# Altium PCB PCB1_Fontes_Chaveadas.PcbDoc
Units mil, origin at the board's own origin, x right, y up, seen from the top; angles counter-clockwise.
Board outline 6000 x 4000 mil, 2 copper layers (Top Layer, Bottom Layer); 84 components, 45 nets, 203 pads, 0 vias.
Unrouted connection lines stored in the file: 104.
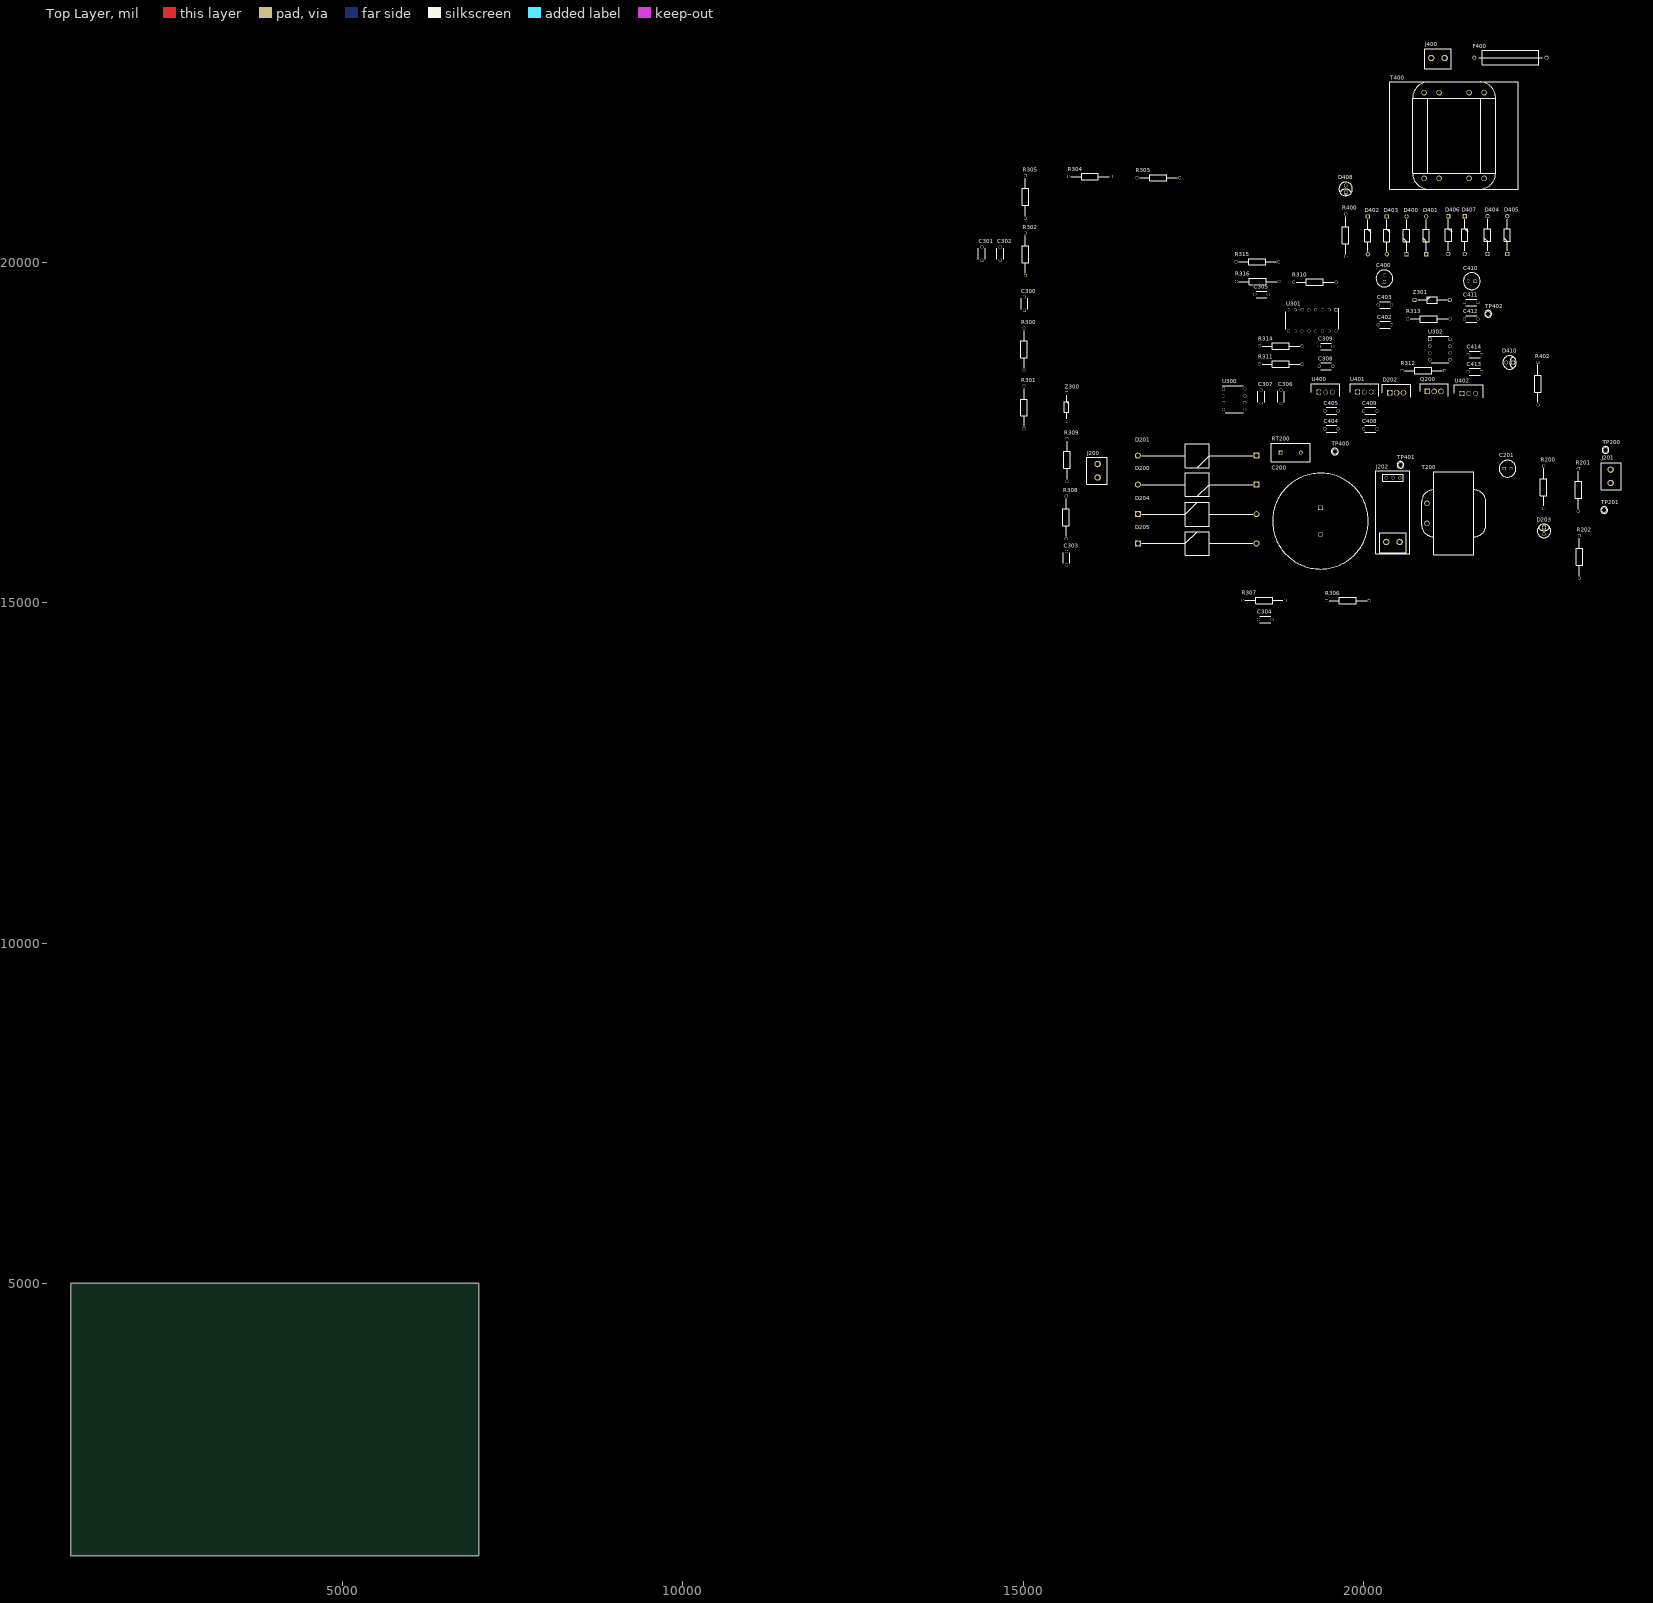
[diagram p0: Top Layer view]
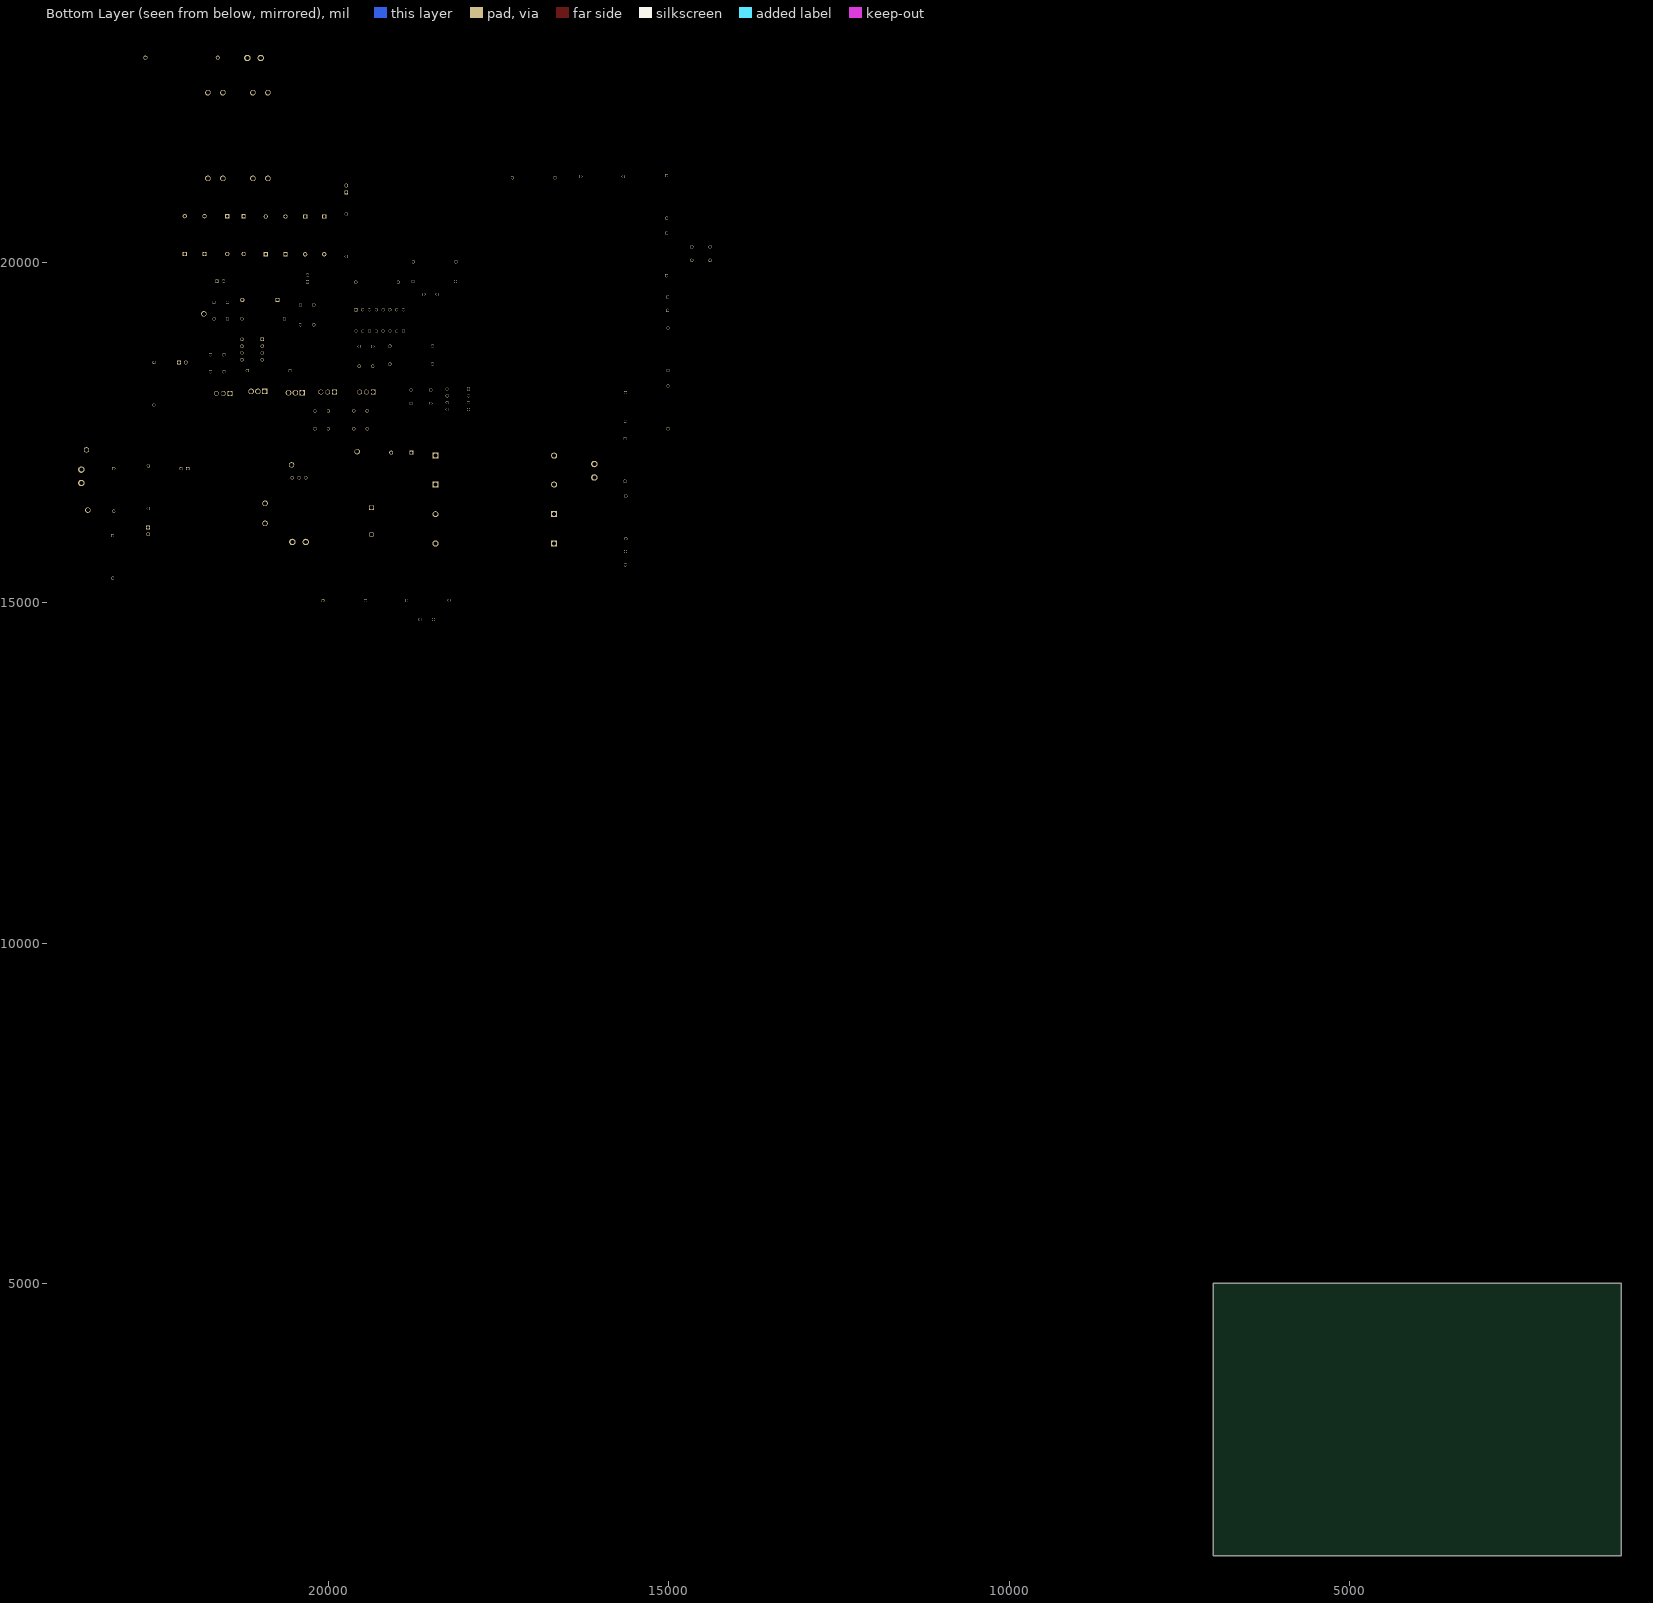
[diagram p1: Bottom Layer view, seen from below]

## Layer stack, top to bottom
Top Solder: solder mask 0.4, Solder Resist, Dk 3.5
Top Layer: signal copper 1.4
Dielectric 1: dielectric 12.6, FR-4, Dk 4.8
Bottom Layer: signal copper 1.4
Bottom Solder: solder mask 0.4, Solder Resist, Dk 3.5

## Board outline
1000,1000 7000,1000 7000,5000 1000,5000

## Design rules (kind name [scope] priority, off if disabled: settings)
Clearance [All] p1: gap=10
Height [All] p1: minheight=0 maxheight=2000 prefheight=500
PolygonConnect [All] p1: connectstyle=Relief reliefconductorwidth=10 reliefentries=4 polygonreliefangle="90 Angle" airgapwidth=10
RoutingVias [All] p1: holewidth=28 width=50 viastyle="Through Hole" minholewidth=28 minwidth=50 maxholewidth=28 maxwidth=50
SolderMaskExpansion [All] p1: expansion=4
Width [All] p1: maxlimit=10 minlimit=10 preferedwidth=10
29 further rules are at their usual default settings.

## Classes and differential pairs
component class U_Sheet3_Fontes_Chaveadas_Fontes_Aux: C400 C402 C403 C404 C405 C408 C409 C410 C411 C412 C413 C414 D400 D401 D402 D403 D404 D405 D406 D407 D408 D410 F400 J400 R400 R402 T400 TP400 TP401 TP402 U400 U401 U402
component class U_Sheet2_Fontes_Chaveadas_Controle: C300 C301 C302 C303 C304 C305 C306 C307 C308 C309 R300 R301 R302 R303 R304 R305 R306 R307 R308 R309 R310 R311 R312 R313 R314 R315 R316 U300 U301 U302 Z300 Z301
component class U_Sheet1_Fontes_Chaveadas_Potencia: C200 C201 D200 D201 D202 D203 D204 D205 J200 J201 J202 Q200 R200 R201 R202 RT200 T200 TP200 TP201

## Components (designator, comment, footprint, x,y, rotation, side; value= is the part's Value field where it differs from the comment)
C200 "5600UF 100V" CAP_RAD_D35MM_L10MM 19370,16400 r270 top
C201 "22UF 35V" CAP_RAD_D6MM3_L2MM5 22070,16975 r0 top
C300 "9PF 100V" CAP_RAD_4X2MM5 15017.76,19301.02 r90 top
C301 "1500PF 50V" CAP_RAD_4X2MM5 14392.76,20036.02 r90 top
C302 "1500PF 50V" CAP_RAD_4X2MM5 14662.76,20036.02 r90 top
C303 "1200PF 50V" CAP_RAD_4X2MM5 15637.76,15561.02 r90 top
C304 "12NF 50V" CAP_RAD_4X2MM5 18458.98,14757.76 r0 top
C305 "9PF 100V" CAP_RAD_4X2MM5 18405,19535 r0 top
C306 "100NF 100V" CAP_RAD_4X2MM5 18790,18130 r270 top
C307 "10NF 100V" CAP_RAD_4X2MM5 18500,18130 r270 top
C308 "100NF 100V" CAP_RAD_4X2MM5 19550,18480 r180 top
C309 "10NF 100V" CAP_RAD_4X2MM5 19550,18770 r180 top
C400 "22UF 35V" CAP_RAD_D6MM3_L2MM5 20310,19720 r90 top
C402 "100NF 100V" CAP_RAD_4X2MM5 20415,19090 r180 top
C403 "10NF 100V" CAP_RAD_4X2MM5 20415,19380 r180 top
C404 "100NF 100V" CAP_RAD_4X2MM5 19631.16,17560 r180 top
C405 "10NF 100V" CAP_RAD_4X2MM5 19631.16,17824.09 r180 top
C408 "100NF 100V" CAP_RAD_4X2MM5 20201.16,17560 r180 top
C409 "10NF 100V" CAP_RAD_4X2MM5 20201.16,17824.09 r180 top
C410 "22UF 35V" CAP_RAD_D6MM3_L2MM5 21642.98,19730 r180 top
C411 "100NF 100V" CAP_RAD_4X2MM5 21684.38,19417.83 r180 top
C412 "10NF 100V" CAP_RAD_4X2MM5 21684.38,19175 r180 top
C413 "100NF 100V" CAP_RAD_4X2MM5 21736.16,18400 r180 top
C414 "10NF 100V" CAP_RAD_4X2MM5 21736.16,18650 r180 top
D200 "100V 6A" DIO_P600_AXIAL 18430,16740 r180 top
D201 "100V 6A" DIO_P600_AXIAL 18430,17165 r180 top
D202 "200V 5A" DIO_PTH_TO220AB 20390,18090 r0 top
D203 "RED" DIO_PTH_LED_RED 22655,16110 r270 top
D204 "100V 6A" DIO_P600_AXIAL 16685.91,16305 r0 top
D205 "100V 6A" DIO_P600_AXIAL 16685.91,15875 r0 top
D400 "1000V 1A" DIO_PTH_DO41_1N4007 20635,20125 r90 top
D401 "1000V 1A" DIO_PTH_DO41_1N4007 20925,20125 r90 top
D402 "1000V 1A" DIO_PTH_DO41_1N4007 20065,20680.12 r270 top
D403 "1000V 1A" DIO_PTH_DO41_1N4007 20345,20680.12 r270 top
D404 "1000V 1A" DIO_PTH_DO41_1N4007 21825,20130 r90 top
D405 "1000V 1A" DIO_PTH_DO41_1N4007 22115,20130 r90 top
D406 "1000V 1A" DIO_PTH_DO41_1N4007 21250,20685.12 r270 top
D407 "1000V 1A" DIO_PTH_DO41_1N4007 21490,20685.12 r270 top
D408 "RED" DIO_PTH_LED_RED 19740,21035 r90 top
D410 "RED" DIO_PTH_LED_RED 22200,18535 r180 top
F400 "5A 250VAC" FUSE_PTH_5X20MM 21630,23015 r0 top
J200 "KRE 2POS" CONN_KF3012P 16095,16845 r90 top
J201 "KRE 2POS" CONN_KF3012P 23635,16960 r270 top
J202 "ACS712 5A" MODULE_ACS712 20535,16840 r180 top
J400 "KRE 2POS" CONN_KF3012P 21195,23010 r180 top
Q200 "100V 50A" MOSFET_TO220AB 20940,18110 r0 top
R200 "2K2 1%" RES_PTH_AXIAL_250MW 22650,17015 r270 top
R201 "47K 1%" RES_PTH_AXIAL_250MW 23160,16975 r270 top
R202 "6K8 1%" RES_PTH_AXIAL_250MW 23175,15990 r270 top
R300 "470K 1%" RES_PTH_AXIAL_250MW 15012.76,18416.02 r90 top
R301 "9M1 5%" RES_PTH_AXIAL_250MW 15012.76,17561.02 r90 top
R302 "12K 1%" RES_PTH_AXIAL_250MW 15032.76,19811.02 r90 top
R303 "50R 1%" RES_PTH_AXIAL_250MW 17300,21250 r180 top
R304 "300R 1%" RES_PTH_AXIAL_250MW 16296.02,21267.24 r180 top
R305 "39R 1%" RES_PTH_AXIAL_250MW 15032.76,21281.02 r270 top
R306 "1K2 5%" RES_PTH_AXIAL_250MW 20085,15035 r180 top
R307 "12K 1%" RES_PTH_AXIAL_250MW 18853.98,15037.76 r180 top
R308 "3K9 1%" RES_PTH_AXIAL_250MW 15632.76,15946.02 r90 top
R309 "100K 1%" RES_PTH_AXIAL_250MW 15645,16790 r90 top
R310 "1K5 5%" RES_PTH_AXIAL_250MW 18975,19715 r0 top
R311 "1K 5%" RES_PTH_AXIAL_250MW 19100,18510 r180 top
R312 "10R 1%" RES_PTH_AXIAL_250MW 21195,18415 r180 top
R313 "1K2 5%" RES_PTH_AXIAL_250MW 20650,19175 r0 top
R314 "1K 5%" RES_PTH_AXIAL_250MW 19100,18775 r180 top
R315 "6K8 1%" RES_PTH_AXIAL_250MW 18755,20015 r180 top
R316 "10R 1%" RES_PTH_AXIAL_250MW 18135,19725 r0 top
R400 "1K2 5%" RES_PTH_AXIAL_250MW 19740,20091.75 r90 top
R402 "300R 1%" RES_PTH_AXIAL_250MW 22565,17910 r90 top
RT200 "10R 6A" NTC_P7MM8_13MM 18785,17210 r0 top
T200 "200MH" TRF_1COIL 20935,16465 r270 top
T400 "TRAFO_4COIL" TRF_8 21775,22500 r270 top
TP200 "TP" TP_TRUE_HOLE_P102 23560,17250 r90 top
TP201 "TP" TP_TRUE_HOLE_P102 23540,16365 r90 top
TP400 "TP" TP_TRUE_HOLE_P102 19580,17225 r90 top
TP401 "TP" TP_TRUE_HOLE_P102 20545,17030 r90 top
TP402 "TP" TP_TRUE_HOLE_P102 21835,19250 r0 top
U300 "LM311" IC_PTH_8DIP 17945,18145 r0 top
U301 "SG3524N" IC_16DIP 19600,19310 r270 top
U302 "OPTO 3.75KV" IC_OPTO_8DIP 20975,18875 r0 top
U400 "7815" IC_TO220AB 19345,18100 r0 top
U401 "7805" IC_TO220AB 19915,18100 r0 top
U402 "7815" IC_TO220AB 21450,18080 r0 top
Z300 "4.7V 500MW" DIO_DO35 15637.76,18091.02 r270 top
Z301 "15V 1.3W" DIO_1N4744A_DO204AL 20752.85,19455 r0 top

## Footprints (in the part's own frame and the unit in brackets; to place one, negate y for a bottom-side part, rotate by r counter-clockwise, add the part's x,y. Pads: shape width x height; smd on the part's side, far side on the other; paste and mask are expansions set on the pad)
CAP_RAD_4X2MM5 [mm] "Size / Dimension: 0.157\" L x 0.098\" W (4.00mm x 2.50mm)"
  round 1.2 hole 1: 1(0,0) 2(5,0)
  silkscreen extent 0.5,-1.25 4.5,1.25, body extent -0.25,-1.25 5.25,1.25, height 6.32
CAP_RAD_D6MM3_L2MM5 [mm] "Size / Dimension: 0.248\" Dia (6.30mm)"
  rect 1.2x1.2 hole 1: 1(0,0)
  round 1.2 hole 1: 2(2.5,0)
  silkscreen extent -1.9,-3.15 4.4,3.15, body extent -2.15,-3.4 4.65,3.4, height 9.5
CAP_RAD_D35MM_L10MM [mm] "Size / Dimension: 1.378\" Dia (35.00mm)"
  rect 1.8x1.8 hole 1.5: 1(0,0)
  round 1.8 hole 1.5: 2(10,0)
  silkscreen extent -12.87,-17.87 22.87,17.88, body extent -13.25,-18.24 23.25,18.24, height 47
CONN_KF3012P [mm]
  round 2.4 hole 1.5: 1(0,0) 2(5,0)
  silkscreen extent -2.5,-3.5 7.5,4, body extent -2.99,-3.35 7.51,4.15, height 10
DIO_1N4744A_DO204AL [mm] "DO-204AL (DO-41) AD1310W86L370D235"
  rect 1.575x1.575 hole 1: 1(0,0)
  round 1.575 hole 1: 2(13.1,0)
  silkscreen extent 1.14,-1.17 11.96,1.17, body extent -0.43,-1.3 13.53,1.3, height 2.6
DIO_DO35 [mm] "Package / Case: DO-204AH, DO-35, Axial"
  rect 1.15x1.15 hole 1: 1(0,0)
  round 1.15 hole 1: 2(10.7,0)
  silkscreen extent 0.92,-0.86 9.77,0.86, body extent -0.27,-0.95 10.95,0.95, height 1.91
DIO_P600_AXIAL [mm] "Package / Case: P600, Axial"
  rect 2.25x2.25 hole 1.5: 1(0,0)
  round 2.25 hole 1.5: 2(44.3,0)
  silkscreen extent 1.48,-4.43 42.82,4.43, body extent 0,0 0.25,0.25, height 0.25
DIO_PTH_DO41_1N4007 [mm] "DO-204AL, DO-41, axial"
  rect 1.575x1.575 hole 1: 1(0,0)
  round 1.575 hole 1: 2(14.1,0)
  silkscreen extent 1.14,-1.17 12.96,1.17, body extent -0.43,-1.35 14.48,1.35, height 2.7
DIO_PTH_LED_RED [mm] "Radial T-1 3/4"
  rect 1.416x1.416 hole 1: 1(0,0)
  round 1.416 hole 1: 2(2.54,0)
  silkscreen extent -1.25,-2.53 3.8,2.53, body extent -1.25,-2.95 4.2,2.95, height 13.41
DIO_PTH_TO220AB [mm] "TO-220-3"
  rect 2.085x2.085 hole 1.5: 1(0,0)
  round 2.085 hole 1.5: 2(2.54,0) 3(5.08,0)
  silkscreen extent -2.8,-1.61 7.88,3.22, body extent -2.54,-1.61 7.62,3.22, height 21.46
FUSE_PTH_5X20MM [mm] "Diâm. 0,217\" x comp. 0,827\" (5,50mm x 21,00mm)"
  round 1.5 hole 1: 1(0,0) 2(27,0)
  silkscreen extent 1.6,-2.7 25.4,2.7, body extent 3.5,-2.57 23.5,2.63, height 5.1
IC_16DIP [mm] "Package / Case: 16-DIP (0.300\", 7.62mm)"
  rect 1.13x1.13 hole 1: 1(0,0)
  round 1.13 hole 1: 2(0,-2.54) 3(0,-5.08) 4(0,-7.62) 5(0,-10.16) 6(0,-12.7) 7(0,-15.24) 8(0,-17.78) 9(7.94,-17.78) 10(7.94,-15.24) 11(7.94,-12.7) 12(7.94,-10.16) 13(7.94,-7.62) 14(7.94,-5.08) 15(7.94,-2.54) 16(7.94,0)
  silkscreen extent -0.57,-18.73 7.27,0.95, body extent 3.97,-8.89 4.22,-8.64, height 0.25
IC_OPTO_8DIP [mm] "8-DIP (0.300\", 7.62mm)"
  rect 1.25x1.25 hole 1: 1(0,0)
  round 1.25 hole 1: 2(0,-2.54) 3(0,-5.08) 4(0,-7.62) 5(7.62,-7.62) 6(7.62,-5.08) 7(7.62,-2.54) 8(7.62,0)
  silkscreen extent -0.63,-8.76 7.11,1.14, body extent -0.16,-8.63 7.78,1.01, height 4.7
IC_PTH_8DIP [mm] "8-DIP (0.300\", 7.62mm)"
  rect 1.13x1.13 hole 1: 1(0,0)
  round 1.13 hole 1: 2(0,-2.54) 3(0,-5.08) 4(0,-7.62) 5(7.94,-7.62) 6(7.94,-5.08) 7(7.94,-2.54) 8(7.94,0)
  silkscreen extent -0.57,-8.89 7.27,1.27, body extent -0.13,-8.45 8.07,0.83, height 4.21
IC_TO220AB [mm] "TO-220-3"
  rect 1.8x1.8 hole 1.5: 1(0,0)
  round 1.8 hole 1.5: 2(2.535,0) 3(5.07,0)
  silkscreen extent -2.8,-1.55 7.87,3.15, body extent -2.55,-1.55 7.61,3.15, height 18.54
MODULE_ACS712 [mm] "Módulo Sensor de Corrente ACS712 5A"
  round 1.2 hole 1: 1(0,0) 2(2.54,0) 3(5.08,0)
  round 2.4 hole 1.5: 4(0.04,23.948) 5(5.04,23.948)
  silkscreen extent -3.81,-2.54 8.89,28.45, body extent -2.72,20.16 7.78,27.66, height 14
MOSFET_TO220AB [mm] "Package / Case: TO-220-3"
  rect 2.07x2.07 hole 1.5: 1(0,0)
  round 2.07 hole 1.5: 2(2.54,0) 3(5.08,0)
  silkscreen extent -2.72,-1.73 7.8,2.92, body extent -2.6,-1.73 7.68,2.92, height 18.74
NTC_P7MM8_13MM [mm] "ICL 10 OHM 20% 6A 13MM"
  rect 1.5x1.5 hole 1: 1(0,0)
  round 1.5 hole 1: 2(7.5,0)
  silkscreen extent -3.5,-3.5 11,3.5, body extent -2.84,-3.5 10.46,3.5, height 19.85
RES_PTH_AXIAL_250MW [mm] "0.094\" Dia x 0.248\" L (2.40mm x 6.30mm)"
  round 1.2 hole 1: 1(0,0) 2(15.9,0)
  silkscreen extent 0.95,-1.2 14.95,1.2, body extent -0.3,-1.3 16.2,1.3, height 2.6
TP_TRUE_HOLE_P102 [mm]
  round 2 hole 1.5: 1(0,0)
  silkscreen extent -1.27,-1.27 1.27,1.27, body extent -1.27,-1.27 1.27,1.27, height 4.89
TRF_1COIL [mil] "BUSCK INDUCTOR"
  round 82 hole 59.06: 1(0,0) 2(295.28,0)
  silkscreen extent -463,-79 758,866, body extent -536,-191 839,969, height 1179
TRF_8 [mm] "Transformer; 8 Leads"
  round 2.083 hole 1.5: 1(0,0) 2(0,-5.6) 3(0,-16.8) 4(0,-22.4) 5(32,-22.4) 6(32,-16.8) 7(32,-5.6) 8(32,0)
  silkscreen extent -4,-35.2 36,12.8, body extent -7.12,-33.45 39.47,10.55, height 29.35

## Part data
C200: library part CAP_ALUM_5600UF_100V_RAD, "CAP ALUM 5600UF 20% 100V SNAP"
C201 C400 C410: library part CAP_ALUM_22UF_35V_RAD, "CAP ALUM POLY 22UF 20% 35V T/H"
C300 C305: library part CAP_CER_9PF_100V_RAD, "CAP CER 9PF 100V C0G RADIAL"
C301 C302: library part CAP_CER_1500PF_50V_RAD, "CAP CER 1500PF 50V C0G RADIAL"
C303: library part CAP_CER_1200PF_50V_RAD, "CAP CER 1200PF 50V C0G RADIAL"
C304: library part CAP_CER_12NF_50V_RAD, "CAP CER 0.012UF 50V C0G/NP0 RAD"
C306 C308 C402 C404 C408 C411 C413: library part CAP_CER_100NF_100V_RAD, "CAP CER 0.1UF 100V X7S RADIAL"
C307 C309 C403 C405 C409 C412 C414: library part CAP_CER_10NF_100V_RAD, "CAP CER 10NF 100V C0G/NP0 RADIAL"
D200 D201 D204 D205: library part DIO_PTH_STD_100V_6A_P600B, "DIODE GEN PURP 100V 6A P600"
D202: library part DIO_PTH_SCHOTTKY_MBR10200CT, "DIODE SCHOTTKY 200V 5A TO220AB"
D203 D408 D410: library part DIO_PTH_LED_RED_5MM, "LED RED DIFFUSED T-1 3/4 T/H"
D400 D401 D402 D403 D404 D405 D406 D407: library part DIO_PTH_STD_1000V_1A_1N4007, "DIODE GEN PURP 1KV 1A DO41"
F400: library part FUSE_PTH_5A_250VAC, "FUSE GLASS 5A 250VAC 5X20MM"
J200 J201 J400: library part CONN_2POS, "TERM BLK 2POS SIDE ENTRY 5MM PCB"
J202: library part MODULE_SENSOR_ACS712, "MODULE CURRENT SENSOR ACS712 5A"
Q200: library part MOSFET_SUP70090E, "MOSFET N-CH 100V 50A TO220AB"
R200: library part RES_2K2_1%_250MW_AXIAL, "RES 2.2K OHM 1% 1/4W AXIAL"
R201: library part RES_47K_1%_250MW_AXIAL, "RES 47K OHM 1% 1/4W AXIAL"
R202 R315: library part RES_6K8_1%_250MW_AXIAL, "RES 6.8K OHM 1% 1/4W AXIAL"
R300: library part RES_470K_1%_250MW_AXIAL, "RES 470K OHM 1% 1/4W AXIAL"
R301: library part RES_9M1_5%_250MW_AXIAL, "RES 9.1M OHM 5% 1/4W AXIAL"
R302 R307: library part RES_12K_1%_250MW_AXIAL, "RES 12K OHM 1% 1/4W AXIAL"
R303: library part RES_50R_1%_500MW_AXIAL, "RES 50 OHM 1/2W 1% AXIAL"
R304 R402: library part RES_300R_1%_250MW_AXIAL, "RES 300 OHM 1% 1/4W AXIAL"
R305: library part RES_39R_1%_250MW_AXIAL, "RES 39 OHM 1% 1/4W AXIAL"
R306 R313 R400: library part RES_1K2_5%_250MW_AXIAL, "RES 1.2K OHM 5% 1/4W AXIAL"
R308: library part RES_3K9_1%_600MW_AXIAL, "RES 3.9K OHM 1% 0.6W AXIAL"
R309: library part RES_100K_1%_250MW_AXIAL, "RES 100K OHM 1% 1/4W AXIAL"
R310: library part RES_1K5_5%_250MW_AXIAL, "RES 1.5K OHM 5% 1/4W AXIAL"
R311 R314: library part RES_1K_5%_250MW_AXIAL, "RES 1K OHM 5% 1/4W AXIAL"
R312 R316: library part RES_10R_1%_250MW_AXIAL, "RES 10 OHM 1% 1/4W AXIAL"
RT200: library part NTC_10R_6A, "ICL 10 OHM 20% 6A 13MM"
T200: library part INDUTOR_BUCK, "INDUCTOR 200MH"
T400: library part TRANSFORMER_4WINDING, "TRANSFORMER 4 COILS"
TP200 TP201 TP400 TP401 TP402: library part TP_PTH_40MIL, "PC TEST POINT MINIATURE BLACK"
U300: library part IC_OPAMP_LM311, "IC DIFF COMP W/STROBE 8DIP"
U301: library part IC_SG3524NG4, "IC REG CTRLR MULT TOPOLOGY 16DIP"
U302: library part OPTO_HCPL3120000E, "OPTOISO 3.75KV 1CH GATE DVR 8DIP"
U400 U402: library part IC_LM7815, "IC REG LINEAR 15V 1.5A TO220AB"
U401: library part IC_LM7805, "IC REG LINEAR 5V 1.5A TO220AB"
Z300: library part DIO_PTH_ZENER_4V7_500MW_DO35, "DIODE ZENER 4.7V 500MW DO35"
Z301: library part DIO_PTH_ZENER_15V_1W3_1N4744A, "DIODE ZENER 15V 1.3W DO41"

## Nets (pads, with @x,y where several pads share a name; then routed paths per layer and width w, separated by ;. In a path a pad name is that pad's centre, name@x,y a point inside that pad or via, vN(x,y) a via of type N, cw(c..) or ccw(c..) an arc to the next point about the centre after c; other vN are vias at no path point)
5V: C408.1 C409.1 J202.1 TP401.1 U401.3
15V: C306.1 C307.1 C308.1 C309.1 C404.1 C405.1 R400.1 TP400.1 U300.8 U301.12 U301.13 U301.15 U400.3 U401.1
15V_B: C413.1 C414.1 R402.1 TP402.1 U302.8 U402.3
24V: C201.1 J201.1 R200.1 R201.1 T200.2 TP200.1
DGND: C410.2 C411.2 C412.2 C413.2 C414.2 D202.2 D406.2 D407.2 D410.2 Q200.3 R313.2 T200.1 U302.5 U402.2 Z301.2
GND: C201.2 C305.1 C306.2 C307.2 C308.2 C309.2 C400.2 C402.2 C403.2 C404.2 C405.2 C408.2 C409.2 D202.1 D202.3 D203.2 D402.2 D403.2 D408.2 J201.2 J202.3 J202.4 R202.2 R303.1 R314.2 R315.2 R316.1 U300.1 U300.4 U301.4 U301.5 U301.8 U302.1 U302.3 U302.4 U400.2 U401.2
NetC200_1: C200.1 Q200.2 RT200.2
NetC200_2: C200.2 D204.2 D205.2 J202.5
NetC300_1: C300.1 R300.2
NetC300_2: C300.2 C301.1 C302.1 R302.1 U300.3
NetC301_2: C301.2 C302.2 R302.2 R305.2
NetC303_1: C303.1 C304.1 R307.2 U301.1
NetC303_2: C303.2 R308.1
NetC304_2: C304.2 R306.2 R307.1
NetC305_2: C305.2 U301.7
NetC400_1: C400.1 C402.1 C403.1 D400.1 D401.1 U400.1
NetC410_1: C410.1 C411.1 C412.1 D404.1 D405.1 U402.1
NetD200_1: D200.1 D201.1 RT200.1
NetD200_2: D200.2 D204.1 J200.1
NetD201_2: D201.2 D205.1 J200.2
NetD203_1: D203.1 R200.2
NetD400_2: D400.2 D402.1 T400.5
NetD401_2: D401.2 D403.1 T400.6
NetD404_2: D404.2 D406.1 T400.7
NetD405_2: D405.2 D407.1 T400.8
NetD408_1: D408.1 R400.2
NetD410_1: D410.1 R402.2
NetF400_1: F400.1 J400.1
NetF400_2: F400.2 T400.1
NetJ202_2: J202.2 R304.2 R305.1
NetJ400_2: J400.2 T400.4
NetQ200_1: Q200.1 R312.2 R313.1 Z301.1
NetR201_2: R201.2 R202.1 R306.1 TP201.1
NetR300_1: R300.1 R301.2
NetR301_1: R301.1 U300.7 Z300.1
NetR303_2: R303.2 R304.1
NetR308_2: R308.2 R309.1
NetR309_2: R309.2 U301.9 Z300.2
NetR311_1: R311.1 R314.1 U301.11 U301.14
NetR311_2: R311.2 U302.2
NetR312_1: R312.1 U302.6 U302.7
NetR316_2: R316.2 U301.6
NetT400_2: T400.2 T400.3
REF_OUT: R310.1 R315.1 U300.2 U301.2
REF_OUT_16: R310.2 U301.16
pads on no net: U300.5 U300.6 U301.3 U301.10